# Altium PCB spoofer.PcbDoc
Units mil, origin at the board's own origin, x right, y up, seen from the top; angles counter-clockwise.
Board outline 2120 x 595 mil, 4 copper layers (Top Layer, Layer 1, Layer 2, Bottom Layer), stack 23.756 mil thick; 11 components, 12 nets, 36 pads, 6 vias.
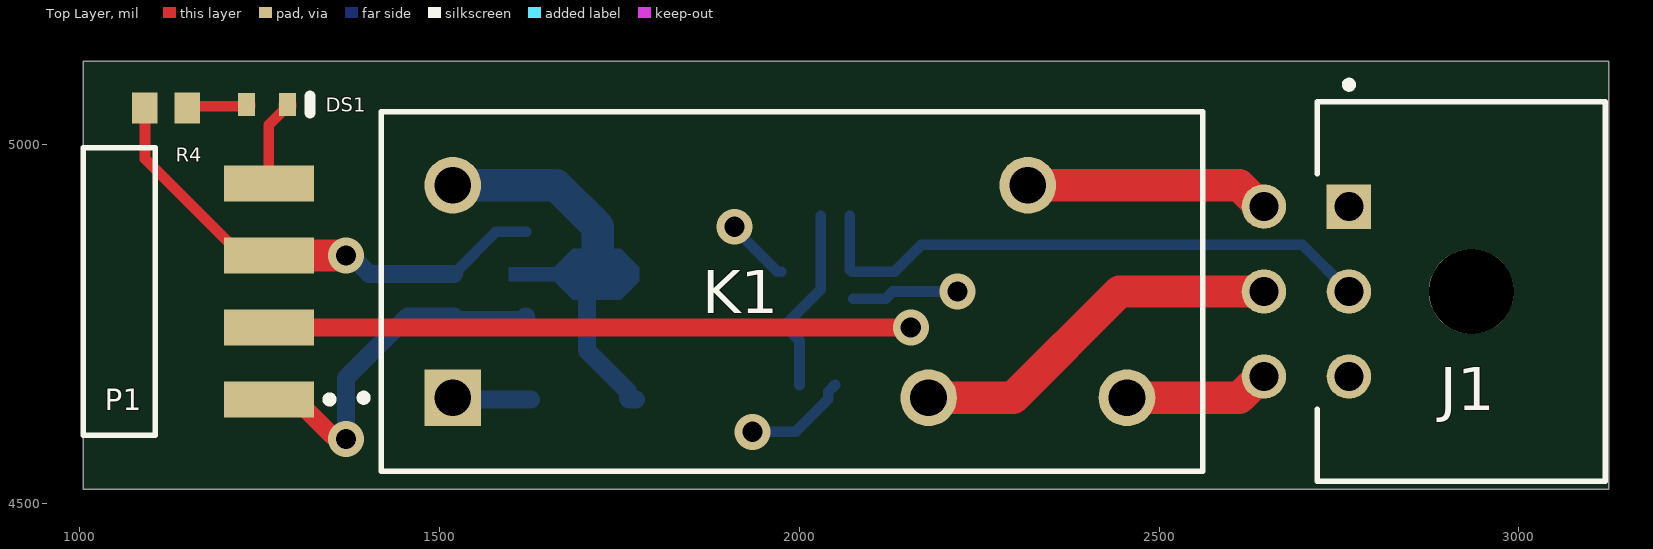
[diagram p0: Top Layer view]
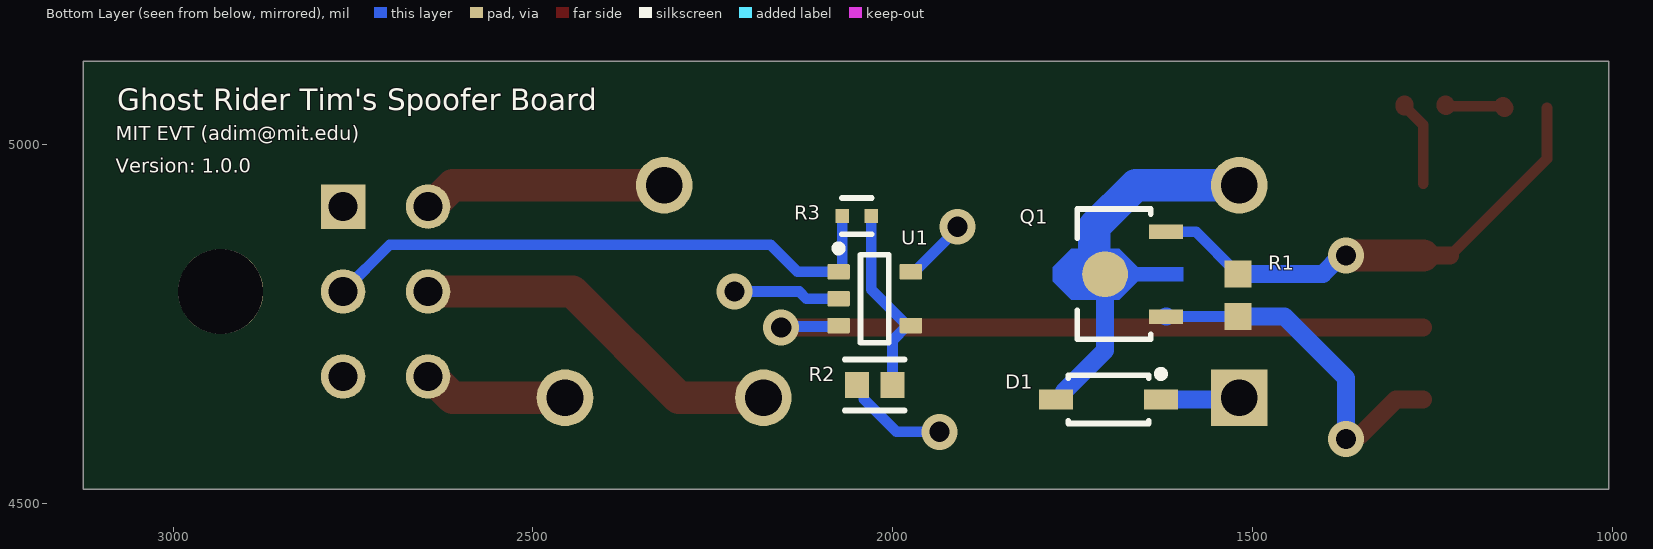
[diagram p1: Bottom Layer view, seen from below]
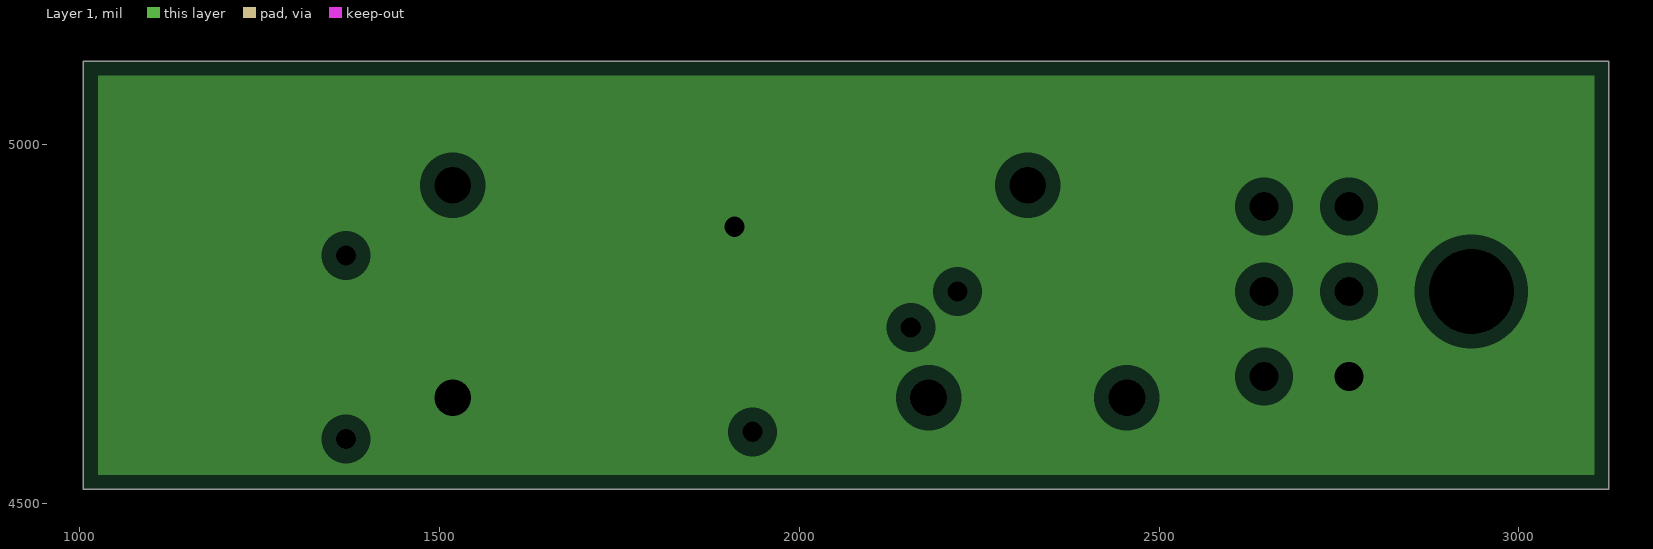
[diagram p2: Layer 1, clearances drawn from the general rule]
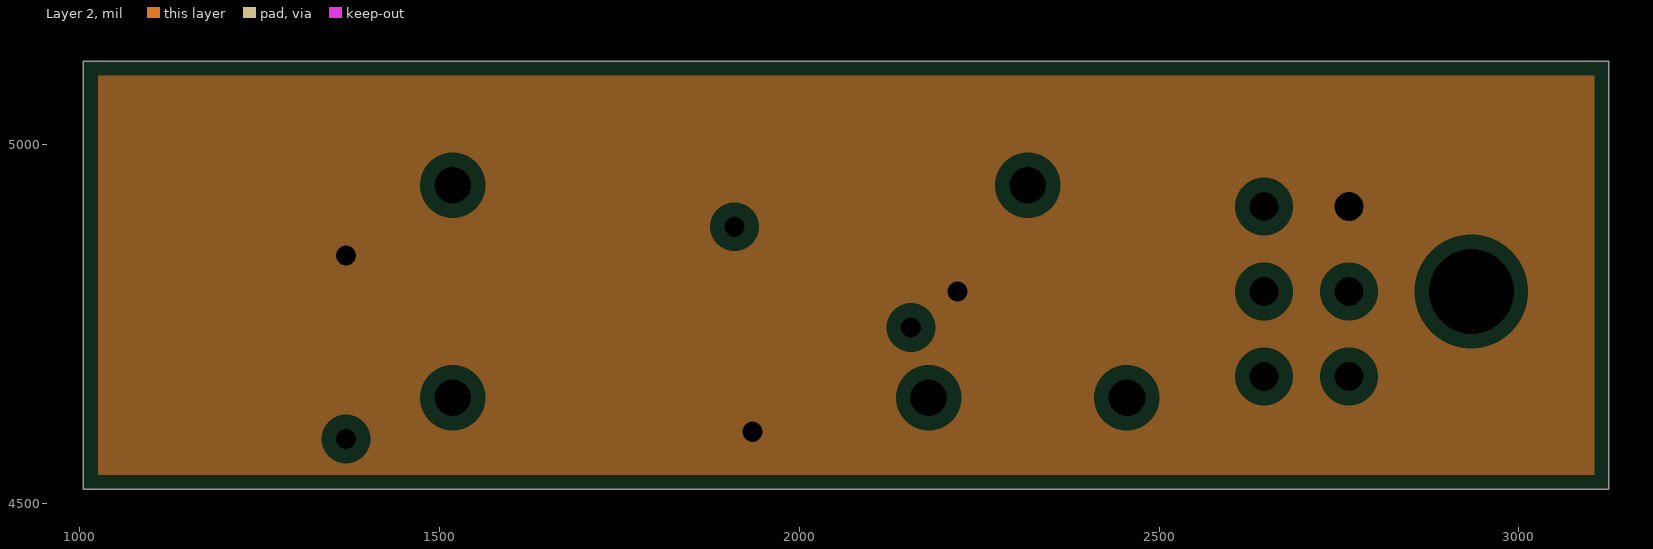
[diagram p3: Layer 2, clearances drawn from the general rule]
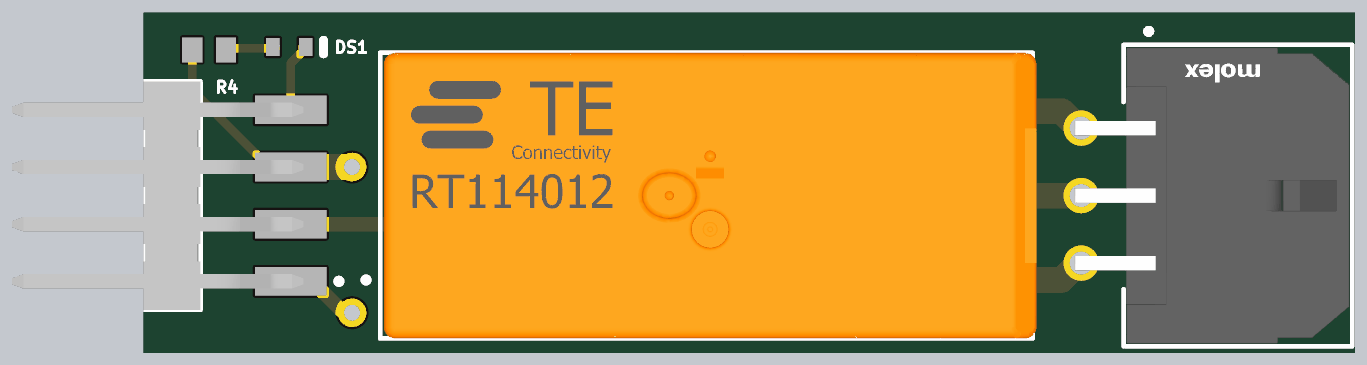
[diagram p4: 3D render of the assembled board from above, using the file's embedded part models]
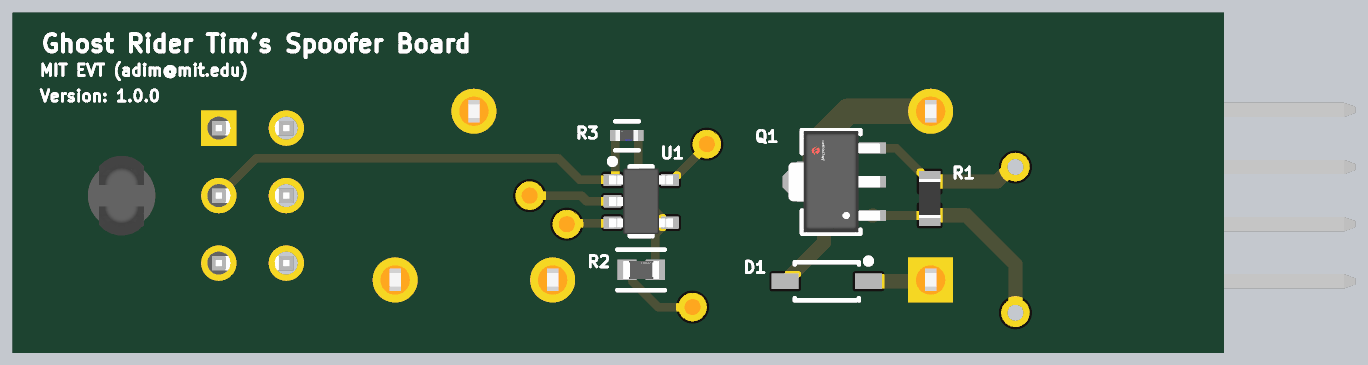
[diagram p5: 3D render of the assembled board from below, using the file's embedded part models]

## Layer stack, top to bottom
Top Solder: solder mask 0.4, Solder Resist, Dk 3.5
Top Layer: signal copper 1.4
Dielectric 2: prepreg 2.8, PP-006, Dk 4.1
Layer 1: plane copper 1.378, net +12
Dielectric 1: dielectric 12.6, FR-4, Dk 4.8
Layer 2: plane copper 1.378, net GND
Dielectric 3: prepreg 2.8, PP-006, Dk 4.1
Bottom Layer: signal copper 1.4
Bottom Solder: solder mask 0.4, Solder Resist, Dk 3.5

## Board outline
1005,4520 1005,5115 3125,5115 3125,4520

## Design rules (kind name [scope] priority, off if disabled: settings)
Clearance [All] p1: gap=10 ignorepadtopadclearanceinfootprint=FALSE except(0: Arc-Hole Track-Hole SMDPad-Hole THPad-Hole Via-Hole Fill-Hole Poly-Hole Region-Hole Text-Hole)
PlaneClearance [All] p1: clearance=20
PlaneConnect [All] p1: planeconnectstyle=Relief reliefexpansion=20 reliefentries=4 reliefconductorwidth=10 reliefairgap=10
PolygonConnect [All] p1: connectstyle=Relief reliefconductorwidth=10 reliefentries=4 polygonreliefangle="90 Angle" airgapwidth=10
RoutingVias [All] p1: holewidth=28 width=50 viastyle="Through Hole" minholewidth=28 minwidth=50 maxholewidth=28 maxwidth=50
SolderMaskExpansion [All] p1: expansion=4 istentingtop=FALSE
Width [All] p1: maxlimit=50 minlimit=10 preferedwidth=25 minimp=50.000000 maximp=50.000000 favimp=50.000000
28 further rules are at their usual default settings.

## Components (designator, comment, footprint, x,y, rotation, side; value= is the part's Value field where it differs from the comment)
D1 "BAT46W-7-F" DIOD-SOD-123-2_V 1700,4645 r180 bottom
DS1 "TLMO1100-GS08" VISH-TLMX1100-2_V 1260,5055 r0 top
J1 "43045-0602" FP-43045-0602-MFG 2920,4795 r90 top
K1 "RT114012" FP-RT114012-MFG 1990,4795 r0 top
P1 "TSM-104-01-T-SH" SMTC-TSM-104-01-X-SH 1050,4795 r90 top
Q1 "TN2510N8-G" FP-TN2510N8-G-IPC_C 1692.44,4819.06 r0 bottom
R1 "ERJ-3EKF4702V" RESC1608X55X30NL15T15 1520,4790 r270 bottom
R2 "ERA-3AEB103V" FP-ERA3A-IPC_C 2025,4665 r180 bottom
R3 "ERJ-2RKF1502X" FP-ERJ2R-MFG 2050,4900 r0 bottom value=15kΩ
R4 "SG73S1JTTD2700F" RESC1608X55X30ML20T10 1120,5050 r180 top
U1 "LM6211MF/NOPB" DBV0005A_L 2025,4785 r180 bottom

## Footprints (in the part's own frame and the unit in brackets; to place one, negate y for a bottom-side part, rotate by r counter-clockwise, add the part's x,y. Pads: shape width x height; smd on the part's side, far side on the other; paste and mask are expansions set on the pad)
DBV0005A_L [mm] "SOT23, 5-Leads, Body 3.05x1.75mm, Pitch 0.95mm, IPC High Density"
  rrect18% 0.8x0.55 smd: 1(-1.275,0.95) 2(-1.275,0) 3(-1.275,-0.95) 4(1.275,-0.95) 5(1.275,0.95)
  silkscreen extent -1.4,-1.55 0.5,1.9, body extent -1.42,-1.46 1.42,1.46, height 1.08
DIOD-SOD-123-2_V [mm] "SOD-123, 2-Leads, Body 2.85x1.7mm (max), Pitch 3.7mm"
  rect 1.2x0.7 smd: 1(-1.85,0) 2(1.85,0)
  silkscreen extent -1.43,-0.85 1.97,1.02, body extent -1.42,-0.85 1.43,0.85, height 1.45
FP-43045-0602-MFG [mm]
  rect 1.57x1.57 hole 1.02 paste-1000 mask+0: 1(3,3.965)
  round 1.57 hole 1.02 paste-1000 mask+0: 2(0,3.965) 3(-3,3.965) 4(3,6.965) 5(0,6.965) 6(-3,6.965)
  round 3 hole 3 unplated paste-1000 mask+0: ""(0,-0.355)
  silkscreen extent -6.7,-5.08 7.42,5.08, body extent -6.8,-5.18 6.8,7.85, height 0.25
FP-ERA3A-IPC_C [mil]
  rect 33.66x35.68 smd paste+0 mask+0: 1(-24.63,0) 2(24.63,0)
  silkscreen extent -41,-35 41,35, body extent -31,-16 31,16, height 22
FP-ERJ2R-MFG [mm]
  rect 0.475x0.5 smd paste+0 mask+0: 1(-0.512,0) 2(0.513,0)
  silkscreen extent -0.53,-0.64 0.53,0.65, body extent -0.5,-0.25 0.5,0.25, height 0.4
FP-RT114012-MFG [mm]
  round 2 hole 1.3 paste-1000 mask+0: 11(8.32,3.75) 12(4.82,-3.75) 14(11.82,-3.75) A2(-11.98,3.75)
  rect 2x2 hole 1.3 paste-1000 mask+0: A1(-11.98,-3.75)
  silkscreen extent -15.25,-6.35 14.5,6.35, body extent -14.6,-6.45 14.6,6.45, height 0.25
FP-TN2510N8-G-IPC_C [mm]
  rect 1.2x0.5 smd paste+0 mask+0: 1(-1.84,1.5) 3(-1.84,-1.5)
  round 1.62 smd paste+0 mask+0: 2(0.316,0)
  Top Layer region: -2.44,-0.25 -2.44,0.25 -0.84,0.25 -0.19,0.9 1.51,0.9 2.16,0.25 2.16,-0.25 1.51,-0.9 -0.19,-0.9 -0.84,-0.25 -2.44,-0.25
  silkscreen extent -1.3,-2.3 1.3,2.3, body extent -2.19,-2.25 1.91,2.25, height 1.6
RESC1608X55X30ML20T10 [mm] "Chip Resistor, 2-Leads, Body 1.60x0.80mm, IPC Low Density"
  rect 0.9x1.1 smd: 1(-0.75,0) 2(0.75,0)
  body extent -0.9,-0.5 0.9,0.5, height 0.55
RESC1608X55X30NL15T15 [mm] "Chip Resistor, 2-Leads, Body 1.75x0.95mm, IPC Medium Density"
  rect 0.95x0.95 smd: 1(-0.75,0) 2(0.75,0)
  body extent -0.87,-0.48 0.87,0.48, height 0.55
SMTC-TSM-104-01-X-SH [mm] "Terminal Strip Single Surface Mount, 1x4 Pins, Horizontal, 2.54mm Pitch, Male"
  rect 1.27x3.18 smd: 1(-3.81,-5.402) 2(-1.27,-5.402) 3(1.27,-5.402) 4(3.81,-5.402)
  silkscreen extent -5.08,-7.67 5.08,1.15, body extent -5.08,-5.96 5.08,6.99, height 3.05
VISH-TLMX1100-2_V [mm] "SMD, 2-Leads, Body 1.6x0.8mm"
  rect 0.6x0.8 smd: 1(-0.725,0) 2(0.725,0)
  silkscreen extent 1.53,-0.3 1.53,0.3, body extent -0.8,-0.4 0.8,0.4, height 0.65

## Part data
D1: library part CMP-0303-00004-1, "Surface Mount Schottky Barrier Diode, 100 V, -55 to 125 degC, 2-Pin SOD123, RoHS, Tape and Reel", Manufacturer="Diodes Inc", Operating Temperature="-55 to 125 degC", ComponentLink1Description="Manufacturer URL", ComponentLink1URL=http://www.diodes.com/, ComponentLink2Description=Datasheet, ComponentLink2URL=http://diodes.com/datasheets/ds30044.pdf, ComponentLink3Description="Package Specification", ComponentLink3URL=http://diodes.com/datasheets/ds30044.pdf, CT@1 V="12 pF Typ.", DatasheetVersion="Rev. 16-2", IR@1.5 V="0.3 uA Max.", Mounting Technology="Surface Mount", PackageDescription="2-Pin SMD, Body 2.7 x 1.55 mm, Height 1.45 mm", Packing="Tape and Reel", PartNumber=BAT46W-7-F, RoHS=TRUE, V(BR)R="100 V Min.", VF@10 mA="0.45 V Max."
DS1: library part CMP-1666-00029-1, "Orange LED, 20 mA, 2.1 V, -40 to 100 degC, 2-Pin SMD (0603), RoHS, Tape and Reel", Capacitance="-323 f", Forward Current="150 mA", Forward Voltage="1 V", Max Operating Temperature="150 degC", Min Operating Temperature="-55 degC", Package Quantity=3000, Peak Reverse Current="5 uA", ComponentLink1Description="Manufacturer URL", ComponentLink1URL=http://www.vishay.com/, ComponentLink2Description=Datasheet, ComponentLink2URL=http://download.siliconexpert.com/pdfs/2016/8/7/12/43/26/667/vsh_/manual/379263299541529tlmb1100.pdf, DatasheetVersion="Rev. 2.7, 03/2016", Height="1 mm", Length="1.8 mm", Mount="Surface Mount", PackageDescription="2-Pin Surface Mount Device, Body 1.6 x 0.8 mm", PackageReference=0603, Packaging="Tape and Reel", Pins=2, Radiation Hardening=No, REACH SVHC="No SVHC", Recovery Time="4 ns", RoHSCompliant=true, Width="1.35 mm"
J1: library part CMP-04776-000581-1, "CONN HEADER R/A 6POS 3MM", Color=Black, Contact Resistance=10mR, Current Rating=5A, Flammability Rating="UL94 V-0", Insulation Resistance=1GR, Max Operating Temperature=105°C, Max Voltage Rating (AC)=250V, Max Voltage Rating (DC)=250.25kV, Min Operating Temperature=-40°C, Package Quantity=1728, Connector Type=Header, Contact Finish - Mating=GOLD, Contact Material=Brass, Contact Plating=Gold, Contact Shape=Square, Contact Type="Male Pin", Depth=12.2mm, Diameter=3mm, Fastening Type=Ramp, Gender=Male, Glow Wire Compliant=Compliant, Halogen Free="Low Halogen", Height=8.77mm, Housing Color=Black, Housing Material=Polymer, Insulation Color=Black, Insulation Material=Polymer, Lead Free="Lead Free", Length=13.15mm, Max Current Rating=5A, Mount="Through Hole", Number of Circuits=6, Number Of Contacts=6, Number of Positions=6, Number of Rows=2, Orientation="Right Angle", Packaging=Tray, Pitch=3mm, Radiation Hardening=No, RoHS Compliant=Yes, Row Spacing=3mm, Series="Micro-Fit 3.0", Termination=Solder, Voltage Rating=250V, Voltage Rating (DC)=250V
K1: library part CMP-03395-000068-1, "RELAY GEN PURPOSE SPDT 12A 12V", Ambient Temperature Range High=+85°C, Ambient Temperature Range Low=-40°C, Coil Power=400mW, Coil Resistance=360Ω, Coil Voltage=12V, Current Rating=12A, Manufacturer="TE Connectivity", Automotive=No, Category=Relay, Coil Type=Non-Latching, ComponentLink2Description=Datasheet, ComponentLink2URL=https://www.te.com/commerce/DocumentDelivery/DDEController?Action=showdoc&DocId=Data+Sheet%7FRT1%7F0219%7Fpdf%7FEnglish%7FENG_DS_RT1_0219.pdf%7F1419108-1, Device Class L1=Electromechanical, Device Class L2=Relays, Device Class L3="Power Relays", Digikey Description="RELAY GEN PURPOSE SPDT 12A 12V", Height=15.7mm, Lead Free=Yes, Manufacturer Part Number=RT114012, Mouser Description="General Purpose Relays RT114012", Number Of Contacts=1, Octopart=https://octopart.com/rt114012-te+connectivity-39636422, Package=RT114012, RoHS=TRUE, Throw Configuration=SPDT
P1: library part CMP-1024-00223-1, "0.025\" SQ Post Header, Surface Mount, Horizontal, -55 to 105 degC, 2.54 mm Pitch, 4-Pin, Male, RoHS", Manufacturer=Samtec, Temperature Range="-55 to 105 degC", ComponentLink1Description="Manufacturer URL", ComponentLink1URL=http://www.samtec.com, ComponentLink2Description=Datasheet, ComponentLink2URL=http://www.samtec.com/documents/webfiles/pdf/TSM.PDF, ComponentLink3Description="Package Specification", ComponentLink3URL=http://www.samtec.com/documents/webfiles/cpdf/TSM-1XX-XX-XXX-SH-XX-XXX-XX-MKT1.pdf, DatasheetVersion=F-214, Mounting Technology="Surface Mount", Orientation=Horizontal, PackageDescription="Terminal Strip Single Surface Mount", PackageReference=TSM-104-01-X-SH, PackageVersion="CD, 7/1991", PartNumber=TSM-104-01-T-SH, Pitch="2.54 mm", RoHS=True
Q1: library part CMP-06369-000016-1, "MOSFET N-CH 100V 730MA TO243AA", Case/Package=TO-243AA, Continuous Drain Current (ID)=730mA, Drain to Source Breakdown Voltage=100V, Drain to Source Resistance=1.5R, Gate to Source Voltage (Vgs)=20V, Input Capacitance=125pF, Max Operating Temperature=150°C, Max Power Dissipation=1.6W, Min Operating Temperature=-55°C, Package Quantity=2000, Contact Plating=Tin, Element Configuration=Single, Fall Time=10ns, Height=1.6mm, Lead Free="Lead Free", Length=4.6mm, Mount="Surface Mount", Number of Channels=1, Number of Elements=1, Number of Pins=4, Packaging="Tape and Reel", Polarity=N-CHANNEL, Power Dissipation=1.6W, Radiation Hardening=No, Rds On Max=1.5R, Rise Time=10ns, Series=-, Turn-Off Delay Time=20ns, Turn-On Delay Time=10ns, Weight=0.001862oz, Width=2.6mm
R1: library part CMP-2000-00523-2, "Chip Resistor, 47 KOhm, +/- 1%, 0.1 W, -55 to 155 degC, 0603 (1608 Metric), RoHS, Tape and Reel", Case Code (Imperial)=0603, Case Code (Metric)=1608, Colour=Red, Forward Current="20 mA", Forward Voltage="2.1 V", Max Operating Temperature="100 degC", Min Operating Temperature="-40 degC", Package Quantity=3000, Power Rating="90 mW", Case\Package=0603, ComponentLink1Description="Manufacturer URL", ComponentLink1URL=http://www.panasonic.com/, ComponentLink2Description=Datasheet, ComponentLink2URL=http://industrial.panasonic.com/cdbs/www-data/pdf/RDA0000/AOA0000C86.pdf, DatasheetVersion=Apr-15, Height="0.6 mm", Illumination Colour=Red, Length="1.6 mm", Lens Style=Clear, Luminous Intensity="63 mcd", Mount="Surface Mount", Nominal Vf="2.1 V", Nominal Wavelength="639 nm", PackageDescription="2-Pin Surface Mount Device, Body 1.6 x 0.85 mm", PackageReference=0603, Packaging="Tape and Reel", Pins=2, Radiation Hardening=No, REACH SVHC="No SVHC", RoHSCompliant=true, Viewing Angle="160 degrees", Width="0.8 mm"
R2: library part CMP-2000-00874-2, "RES SMD 10K OHM 0.1% 1/10W 0603", Case Code (Imperial)=0603, Case Code (Metric)=1608, Max Operating Temperature=155°C, Max Power Dissipation=100mW, Min Operating Temperature=-55°C, Package Quantity=5000, Resistance=10kR, Resistance Tolerance=0.1%, Resistor Type="Thin Film", Temperature Coefficient=25ppm/°C, Voltage Rating=75V, Case/Package=0603, Construction=Rectangular, Contact Plating=Tin, Depth=0.8mm, Height=0.45mm, Lead Free="Lead Free", Length=1.6mm, Military Standard=Not, Mount="Surface Mount", Number of Pins=2, Number of Terminations=2, Packaging="Tape and Reel", Power Rating=100mW, Radiation Hardening=No, REACH SVHC="No SVHC", RoHS Compliant=Yes, Series=ERA-3A, Size Code=0603, Technology="METAL FILM", Termination=SMD/SMT, Tolerance=0.1%, Voltage Rating (DC)=75V, Width=0.8mm
R3: library part CMP-2002-00694-4, "RES SMD 15K OHM 1% 1/10W 0402", Manufacturer=Panasonic, Package=ERJ2R, Power Rating=0.1W, Resistance=15kΩ, Temperature="-55°C to +155°C", Temperature Coefficient=100ppm/°C, Temperature Range High=+155°C, Temperature Range Low=-55°C, Tolerance=1%, Voltage Rating=50V, Automotive=Yes, Automotive Grade="Grade 0", Category=Res, ComponentLink2Description=Datasheet, ComponentLink2URL=https://industrial.panasonic.com/cdbs/www-data/pdf/RDA0000/AOA0000C304.pdf, Composition="Thick Film", Device Class L1="Passive Components", Device Class L2=Resistors, Device Class L3="Chip SMD Resistors", Digikey Description="RES SMD 15K OHM 1% 1/10W 0402", Footprint Url=https://b2b-api.panasonic.eu/file_stream/pids/fileversion/1180, Height=0.4mm, Lead Free=Yes, Manufacturer Part Number=ERJ-2RKF1502X, Mouser Description="Res Thick Film 1.0 x 0.5 mm 15K Ohm 1% 0.1W(1/10W) 100ppm/ C Molded SMD Punched Carrier T/R", Octopart=https://octopart.com/erj-2rkf1502x-panasonic-55404985, RoHS=TRUE, Series=ERJ
R4: library part CMP-2000-01816-1, Manufacturer="KOA Speer", Part Number=SG73S1JTTD2700F
U1: library part CMP-0055-01295-3, "Low Noise, RRO Operational Amplifier with CMOS Input and 24V Operation, 5-pin SOT-23, Pb-Free", Manufacturer="Texas Instruments", Package Reference=DBV0005A, PackageTopMarking=AT1A*XTT, PowerWise=Y, ComponentLink1Description="Datasheet URL", ComponentLink1URL=http://www.ti.com/general/docs/lit/getliterature.tsp?genericPartNumber=LM6211&fileType=pdf, CompType=Amplifiers, PackageDescription="Molded SOT-23, .115 x .063 x .040 in Body, 5 Lead, .0375 in Pitch", PinCount=5, RoHS=Y

## Via types
v1: diameter 50, hole 28, Top Layer to Bottom Layer, 6 vias

## Nets (pads, with @x,y where several pads share a name; then routed paths per layer and width w, separated by ;. In a path a pad name is that pad's centre, name@x,y a point inside that pad or via, vN(x,y) a via of type N, cw(c..) or ccw(c..) an arc to the next point about the centre after c; other vN are vias at no path point)
+5: DS1.2 P1.4 | length 120.7
  Top Layer w15: P1.4 1262.69,5026.58 DS1.2@1288.54,5052.44
  Top Layer w25: DS1.2@1288.54,5052.44 DS1.2
+12: D1.2 J1.3 K1.A1 U1.5 | length 202.1
  Bottom Layer w15: v1(1910,4885) 1910,4882.28 1969.88,4822.4 U1.5
  Bottom Layer w25: K1.A1 1520.71,4645 D1.2
DAC0: P1.2 U1.3 | length 973.2
  Top Layer w25: P1.2 v1(2155,4745)
  Bottom Layer w15: U1.3 2076.5,4746.3 2153.7,4746.3 v1(2155,4745)
DAC1: P1.1 Q1.1 R1.2 | length 500.7
  Top Layer w25: P1.1 1300.29,4645 1350.5,4594.78 1365.22,4594.78 v1(1370,4590)
  Bottom Layer w15: R1.2@1520.24,4760.24 Q1.1@1619.76,4760.24
  Bottom Layer w25: v1(1370,4590) 1370,4675 1455.47,4760.47 R1.2 R1.2@1520.24,4760.24 ; Q1.1@1619.76,4760.24 Q1.1
GND: J1.1 P1.3 Q1.3 R1.1 R2.1 R4.2 U1.2 | length 986.9
  Top Layer w15: R4.2 1090.47,4979.62 P1.3@1225.09,4845
  Top Layer w25: P1.3@1225.09,4845 P1.3
  Top Layer w45: P1.3 v1(1370,4845)
  Bottom Layer w15: R1.1 1578.58,4878.11 Q1.3 ; v1(1935,4600) 1994.78,4600 2040.3,4645.52 2040.3,4655.67 R2.1 ; U1.2 2120,4785 2130,4795 v1(2220,4795)
  Bottom Layer w25: v1(1370,4845) 1376.76,4845 1402.24,4819.53 R1.1
IN: J1.4 K1.11 | length 340.5
  Top Layer w45: K1.11 2611.71,4942.64 2641.24,4913.11 J1.4
NC: J1.5 K1.12 | length 527.2
  Top Layer w45: K1.12 2297.36,4647.36 2445,4795 J1.5
NetD1_1: D1.1 K1.A2 Q1.2 | length 505.7
  Bottom Layer w25: Q1.2 1704.9,4712.94 1761.71,4656.12 1761.71,4646.28 1762.99,4645 D1.1
  Bottom Layer w45: K1.A2 1662.36,4942.64 1720,4885 1720,4839.24 1704.9,4824.14 Q1.2
NetDS1_1: DS1.1 R4.1 | length 85.1
  Top Layer w15: R4.1@1152.03,5052.5 DS1.1@1230.77,5052.5
  Top Layer w25: R4.1 R4.1@1152.03,5052.5 ; DS1.1@1230.77,5052.5 1231.46,5053.19 DS1.1
NetR2_2: R2.2 R3.1 U1.4 | length 269.2
  Bottom Layer w15: U1.4 U1.4@1979.72,4747.6 ; R2.2 2000.37,4726.95 U1.4@1979.72,4747.6 ; R3.1 2029.82,4797.7 U1.4@1979.72,4747.6
NO: J1.6 K1.14 | length 202.7
  Top Layer w45: K1.14 2611.71,4647.36 2641.24,4676.89 J1.6
THROTTLE: J1.2 R3.2 U1.1 | length 811.9
  Bottom Layer w15: R3.2 2070.18,4825.73 2073.5,4822.4 U1.1 2132.4,4822.4 2170,4860 2698.9,4860 J1.2
pads on no net: J1.

## Polygon pours and split planes (outlines as drawn)
+12 on Layer 1 (split plane): 3104.9,4540.1 1025.1,4540.1 1025.1,5094.9 3104.9,5094.9
GND on Layer 2 (split plane): 3104.9,4540.1 1025.1,4540.1 1025.1,5094.9 3104.9,5094.9

## Silkscreen, mask and mechanical layers (free items; w line width, h text height)
Bottom Overlay:
  text "Ghost Rider Tim's Spoofer Board" at 3078,5047 h30
  text "MIT EVT (adim@mit.edu)" at 3080,5005 h20
  text "Version: 1.0.0" at 3080,4960 h20
Mechanical 1:
  the board outline again, w10